# Altium PCB peripheral.PCBDOC (part 4 of 4)
Units mil, origin at the board's own origin, x right, y up, seen from the top; angles counter-clockwise.
Board outline 7500 x 3963 mil, 6 copper layers (Top Layer, Internal Plane 1, MidLayer1, MidLayer2, Internal Plane 2, Bottom Layer); 212 components, 387 nets, 1676 pads, 795 vias.
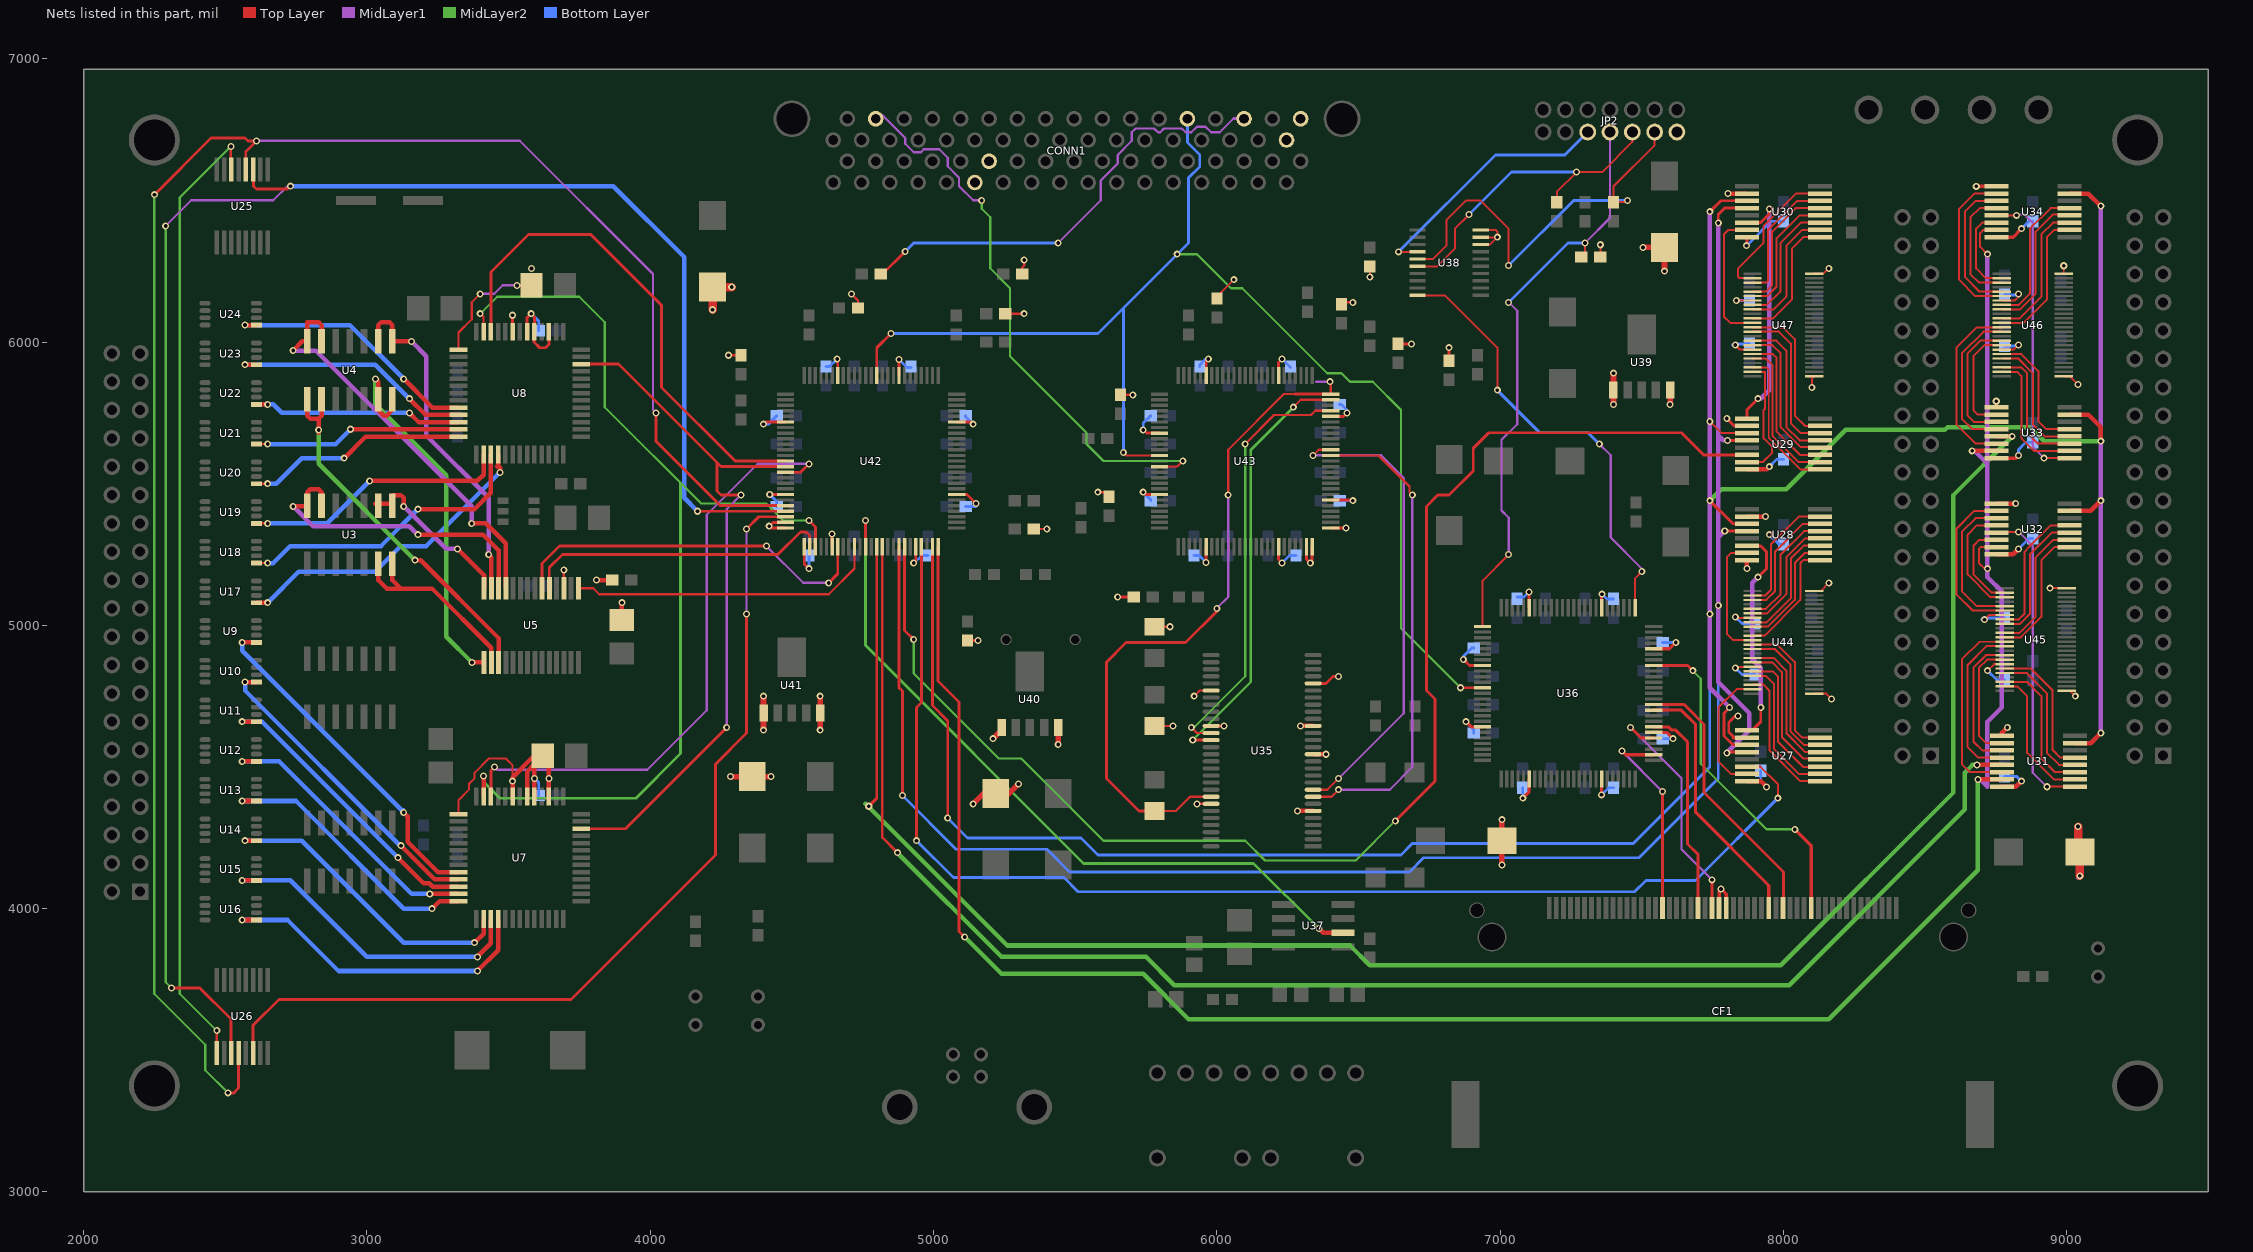
[diagram p8: the nets of this part, all layers, seen from the top]

## Via types
v1: diameter 25, hole 13.5, Top Layer to Bottom Layer, 795 vias

## Nets (pads, with @x,y where several pads share a name; then routed paths per layer and width w, separated by ;. In a path a pad name is that pad's centre, name@x,y a point inside that pad or via, vN(x,y) a via of type N, cw(c..) or ccw(c..) an arc to the next point about the centre after c; other vN are vias at no path point) (continued)
NetU3_6: U3.6 U3.7 U5.2 | length 707.7
  Top Layer w16: U3.6@3040,5217.64 3040,5160 3070,5130 3230,5130 3439.25,4920.75 U5.2@3439.25,4869.09 ; U3.7@3090,5217.64 3090,5160 3120,5130
NetU3_8: U3.8 U3.9 U5.28 | length 605
  Top Layer w16: U3.9@3030,5430 3082.36,5430 U3.8@3090,5422.36 3090,5460 3120,5460 3130,5450 v1(3130,5420) ; v1(3320,5270) 3413.66,5176.34 U5.28@3413.66,5130.91
  MidLayer1 w16: v1(3130,5420) 3280,5270 v1(3320,5270)
NetU3_13: U3.13 U3.14 U5.26 | length 1127.8
  Top Layer w16: v1(2740,5420) 2787.64,5420 U3.14@2790,5422.36 2790,5470 2800,5480 2830,5480 2840,5470 U3.13@2840,5422.36 ; v1(3180,5320) 3410,5320 3464.84,5265.16 U5.26@3464.84,5130.91
  MidLayer1 w16: v1(2740,5420) 2810,5350 3150,5350 v1(3180,5320)
NetU4_1: U4.1 U4.2 U5.3 | length 1319.1
  Top Layer w16: U4.1@2790,5797.64 2790,5740 2800,5730 2830,5730 ; v1@2830,5680 2830,5730 ; U4.2@2840,5797.64 2840,5740 2830,5730 ; v1(3170,5230) 3190,5230 3464.84,4955.16 U5.3@3464.84,4869.09
  MidLayer2 w16: v1(2830,5690) 2830,5570 v1(3170,5230)
NetU4_6: U4.6 U4.7 U5.1 | length 1403.2
  Top Layer w16: v1(3030,5870) 3040,5860 3040,5760 3060,5740 3070,5740 3090,5760 U4.7@3090,5797.64 ; v1(3370.91,4869.09) U5.1@3413.66,4869.09
  MidLayer2 w16: v1(3030,5870) 3030,5780 3280,5530 3280,4960 v1(3370.91,4869.09)
NetU4_8: U4.8 U4.9 U5.27 | length 1229.3
  Top Layer w16: U4.9@3040,6002.36 3040,6060 3050,6070 3080,6070 3090,6060 U4.8@3090,6002.36 v1(3157.64,6002.36) ; v1(3430,5250) 3439.25,5240.75 U5.27@3439.25,5130.91
  MidLayer1 w16: v1(3157.64,6002.36) 3210,5950 3210,5670 3430,5450 v1(3430,5250)
NetU4_13: U4.13 U4.14 U5.25 | length 1472.9
  Top Layer w16: v1(2740,5970) 2772.36,6002.36 U4.14@2790,6002.36 ; U4.14@2787.64,6000 U4.14@2790,6002.36 ; U4.13@2840,6002.36 2840,6060 2830,6070 2790,6070 U4.14@2790,6002.36 ; v1(3370,5360) 3420,5360 3490.43,5289.57 U5.25@3490.43,5130.91 U5.25@3490,5131.34
  MidLayer1 w16: v1(2740,5970) 2820,5970 3370,5420 v1(3370,5360)
NetU5_15: U5.15 U42.35 | length 1097.8
  Top Layer w8: U5.15@3746.34,5130.91 3799.09,5130.91 3820,5110 4630,5110 4720.94,5200.94 U42.35@4720.94,5277.83
NetU5_19: U5.19 U42.27 | length 1089
  Top Layer w10: U5.19@3643.98,5130.91 3643.98,5203.98 3690,5250 4450,5250 4530,5330 4550,5330 4563.46,5316.54 U42.27@4563.46,5277.83
NetU5_20: U5.20 U42.32 | length 1319.5
  Top Layer w10: U5.20@3618.39,5130.91 3618.39,5218.39 3680,5280 v1(4410,5280) ; v1(4630,5150) 4661.89,5181.89 U42.32@4661.89,5277.83
  MidLayer1 w8: v1(4410,5280) 4540,5150 v1(4630,5150)
NetU7_9: U7.9 U9.1 | length 1229.8
  Top Layer w16: v1(2560,4940) U9.1@2610,4940 ; v1(3130,4340) 3143.6,4326.4 3143.6,4236.4 3251.18,4128.82 U7.9@3323.46,4128.82
  Bottom Layer w10: v1(3130,4340) v1@3130,4350
  Bottom Layer w16: v1(2560,4940) 2560,4910 v1(3130,4340)
NetU7_10: U7.10 U10.1 | length 1099.7
  Top Layer w16: v1(2570,4800) U10.1@2610,4800 ; v1(3120,4222.28) 3121.14,4221.14 3239.05,4103.23 U7.10@3323.46,4103.23
  Bottom Layer w16: v1(2570,4800) 2570,4770 3117.72,4222.28 v1(3120,4222.28)
NetU7_11: U7.11 U11.1 | length 1054.7
  Top Layer w16: v1(2560,4660) U11.1@2610,4660 ; v1(3110,4180) 3200,4090 3219.75,4090 3232.12,4077.64 U7.11@3323.46,4077.64
  Bottom Layer w16: v1(2560,4660) 2630,4660 v1(3110,4180)
NetU7_12: U7.12 U12.1 | length 1007.3
  Top Layer w16: v1(2560,4520) U12.1@2610,4520 ; v1(3222.05,4052.05) U7.12@3323.46,4052.05
  Bottom Layer w16: v1(2560,4520) 2690,4520 3157.95,4052.05 v1(3222.05,4052.05)
NetU7_13: U7.13 U13.1 | length 971.8
  Top Layer w16: v1(2560,4380) U13.1@2600,4380 ; v1(3230,4000) 3256.46,4026.46 U7.13@3323.46,4026.46
  Bottom Layer w16: v1(2560,4380) 2750,4380 3130,4000 v1(3230,4000)
NetU7_15: U7.15 U14.1 | length 1095.9
  Top Layer w16: v1(2570,4240) U14.1@2610,4240 ; v1(3380,3880) 3412.05,3912.05 U7.15@3412.05,3963.46
  Bottom Layer w16: v1(2570,4240) 2770,4240 3130,3880 v1(3380,3880)
NetU7_16: U7.16 U15.1 | length 1145
  Top Layer w16: v1(2560,4100) U15.1@2610,4100 ; v1(3390,3830) 3437.64,3877.64 U7.16@3437.64,3963.46
  Bottom Layer w16: v1(2560,4100) 2730,4100 3000,3830 v1(3390,3830)
NetU7_17: U7.17 U16.1 | length 1168.4
  Top Layer w16: v1(2560,3960) U16.1@2610,3960 ; v1(3390,3780) 3463.23,3853.23 U7.17@3463.23,3963.46
  Bottom Layer w16: v1(2560,3960) 2720,3960 2900,3780 v1(3390,3780)
NetU7_50: U7.50 U42.15 | length 2168.6
  Top Layer w10: U7.50@3437.64,4396.54 3437.64,4487.64 v1(3450,4500) ; U42.15@4477.83,5540.63 4530.63,5540.63 v1(4560,5570)
  MidLayer1 w8: v1(3450,4500) 3460,4490 3990,4490 4200,4700 4200,5390 4380,5570 v1(4560,5570)
NetU8_9: U8.9 U24.1 | length 914.1
  Top Layer w16: v1(2570,6060) U24.1@2610,6060 ; v1(3130,5870) 3231.18,5768.82 U8.9@3323.46,5768.82
  Bottom Layer w16: v1(2570,6060) 2940,6060 v1(3130,5870)
NetU8_10: U8.10 U23.1 | length 866.7
  Top Layer w16: v1(2570,5920) U23.1@2610,5920 ; v1(3150,5800) 3206.77,5743.23 U8.10@3323.46,5743.23
  Bottom Layer w16: v1(2570,5920) 3030,5920 v1(3150,5800)
NetU8_11: U8.11 U22.1 | length 739.3
  Top Layer w16: U22.1@2610,5780 v1(2650,5780) ; v1(3150,5750) 3182.36,5717.64 U8.11@3323.46,5717.64
  Bottom Layer w16: v1(2650,5780) 2670,5780 2700,5750 v1(3150,5750)
NetU8_12: U8.12 U21.1 | length 735
  Top Layer w8: U21.1@2610,5640 v1(2650,5640)
  Top Layer w16: v1(2942.05,5692.05) U8.12@3323.46,5692.05
  Bottom Layer w16: v1(2650,5640) 2890,5640 v1(2942.05,5692.05)
NetU8_13: U8.13 U20.1 | length 782.4
  Top Layer w8: U20.1@2610,5500 v1(2650,5500)
  Top Layer w16: v1(2920,5590) 2996.46,5666.46 U8.13@3323.46,5666.46
  Bottom Layer w16: v1(2650,5500) 2680,5500 2770,5590 v1(2920,5590)
NetU8_15: U8.15 U19.1 | length 944.7
  Top Layer w8: U19.1@2610,5360 v1(2650,5360)
  Top Layer w16: v1(3010,5510) 3390,5510 3412.05,5532.05 U8.15@3412.05,5603.46
  Bottom Layer w16: v1(2650,5360) 2860,5360 v1(3010,5510)
NetU8_16: U8.16 U18.1 | length 1066
  Top Layer w8: U18.1@2610,5220 v1(2650,5220)
  Top Layer w16: v1(3180,5410) 3380,5410 3437.64,5467.64 U8.16@3437.64,5603.46
  Bottom Layer w16: v1(2650,5220) 2670,5220 2730,5280 3050,5280 v1(3180,5410)
NetU8_17: U8.17 U17.1 | length 1121
  Top Layer w16: U17.1@2610,5080 v1(2650,5080) ; 3460.64,5560.64 3463.23,5563.23 U8.17@3463.23,5603.46 ; 3463.23,5563.74 3470,5556.97 v1(3470,5540)
  Bottom Layer w16: v1(2650,5080) 2760,5190 3030,5190 3120,5280 3210,5280 v1(3470,5540)
NetU8_50: U8.50 U42.13 | length 1807.4
  Top Layer w10: U8.50@3437.64,6036.54 3437.64,6247.64 3570,6380 3790,6380 4040,6130 4040,5840 4300,5580 U42.13@4477.83,5580
NetU25_14: U25.14 U26.9 | length 3409.3
  Top Layer w8: U26.9@2470.43,3491.06 v1(2470.43,3569.57) ; v1(2520,6690) 2520,6620 2521.61,6618.39 U25.14@2521.61,6608.94
  MidLayer2 w8: v1(2470.43,3569.57) 2340,3700 2340,6510 v1(2520,6690)
NetU27_1: U27.1 U44.46 | length 502
  Top Layer w7: U44.46@7890.75,4790.39 7929.61,4790.39 7950,4770 7950,4560 8059.57,4450.43 U27.1@8128.94,4450.43
NetU27_2: U27.2 U44.44 | length 516.2
  Top Layer w7: U44.44@7890.75,4821.89 7938.11,4821.89 7966,4794 7966,4564 8053.98,4476.02 U27.2@8128.94,4476.02
NetU27_3: U27.3 U44.43 | length 523.8
  Top Layer w7: U44.43@7890.75,4837.64 7962.36,4837.64 7980,4820 7980,4590 8070,4500 U27.3@8140,4500
NetU27_4: U27.4 U44.41 | length 503.9
  Top Layer w7: U44.41@7890.75,4869.13 7960,4869.13 7994,4835.13 7994,4606 8070,4530 U27.4@8120,4530
NetU27_5: U27.5 U44.40 | length 504.6
  Top Layer w7: U44.40@7890.75,4884.88 7965.12,4884.88 8010,4840 8010,4620 8077.21,4552.8 U27.5@8128.94,4552.8
NetU27_6: U27.6 U44.38 | length 516.7
  Top Layer w7: U44.38@7890.75,4916.38 7970,4916.38 8024,4862.38 8024,4626 8071.61,4578.39 U27.6@8128.94,4578.39
NetU27_7: U27.7 U44.37 | length 514.7
  Top Layer w7: U44.37@7890.75,4932.13 7977.87,4932.13 8040,4870 8040,4630 8066.02,4603.98 U27.7@8128.94,4603.98
NetU27_14: U27.14 U42.47 | length 4480.7
  Top Layer w7: U27.14@7871.06,4501.61 7918.39,4501.61 7980,4440 v1(7980,4390)
  Top Layer w10: v1(4940,4240) 4940,4710 4957.17,4727.17 U42.47@4957.17,5277.83
  Bottom Layer w10: v1(4940,4240) 5070,4110 5460,4110 5510,4060 7474.61,4060 7514.61,4100 7690,4100 v1(7980,4390)
NetU27_15: U27.15 U44.47 | length 456.8
  Top Layer w7: U27.15@7871.06,4476.02 7813.98,4476.02 7770,4520 7770,4710 7834.65,4774.65 U44.47@7890.75,4774.65
NetU28_1: U28.1 U44.35 | length 424.9
  Top Layer w7: U44.35@7890.75,4963.62 7933.62,4963.62 8060,5090 8060,5220 8070.43,5230.43 U28.1@8128.94,5230.43
NetU28_2: U28.2 U44.33 | length 422.4
  Top Layer w7: U44.33@7890.75,4995.12 7945.12,4995.12 8040,5090 8040,5220 8076.02,5256.02 U28.2@8128.94,5256.02
NetU28_3: U28.3 U44.32 | length 432.3
  Top Layer w7: U44.32@7890.75,5010.87 7940.87,5010.87 8026,5096 8026,5236 8071.61,5281.61 U28.3@8128.94,5281.61
NetU28_4: U28.4 U44.30 | length 424
  Top Layer w7: U44.30@7890.75,5042.36 7942.36,5042.36 8010,5110 8010,5240 8077.21,5307.21 U28.4@8128.94,5307.21
NetU28_5: U28.5 U44.29 | length 434
  Top Layer w7: U44.29@7890.75,5058.11 7938.11,5058.11 7990,5110 7990,5250 8072.8,5332.8 U28.5@8128.94,5332.8
NetU28_6: U28.6 U44.27 | length 431.5
  Top Layer w7: U44.27@7890.75,5089.61 7939.61,5089.61 7970,5120 7970,5260 8068.39,5358.39 U28.6@8128.94,5358.39
NetU28_7: U28.7 U44.26 | length 447.4
  Top Layer w7: U44.26@7890.75,5105.35 7935.56,5105.35 7956,5125.8 7956,5286 8053.98,5383.98 U28.7@8128.94,5383.98
NetU28_15: U28.15 U44.36 | length 447.6
  Top Layer w7: U28.15@7871.06,5256.02 7816.02,5256.02 7800,5240 7800,4970 7822.13,4947.87 U44.36@7890.75,4947.87
NetU29_1: U29.1 U47.46 | length 527.9
  Top Layer w7: U47.46@7890.75,5910.39 7939.61,5910.39 7948,5902 7948,5662 8059.57,5550.43 U29.1@8128.94,5550.43
NetU29_2: U29.2 U47.44 | length 536.2
  Top Layer w7: U47.44@7890.75,5941.89 7938.11,5941.89 7962,5918 7962,5668 8053.98,5576.02 U29.2@8128.94,5576.02
NetU29_3: U29.3 U47.43 | length 538
  Top Layer w7: U47.43@7890.75,5957.64 7962.36,5957.64 7976,5944 7976,5684 8058.39,5601.61 U29.3@8128.94,5601.61
NetU29_4: U29.4 U47.41 | length 550.3
  Top Layer w7: U47.41@7890.75,5989.13 7960.87,5989.13 7990,5960 7990,5700 8060,5630 U29.4@8140,5630
NetU29_5: U29.5 U47.40 | length 542.2
  Top Layer w7: U47.40@7890.75,6004.88 7975.12,6004.88 8010,5970 8010,5700 8057.21,5652.8 U29.5@8128.94,5652.8
NetU29_6: U29.6 U47.38 | length 550.5
  Top Layer w7: U47.38@7890.75,6036.38 7983.62,6036.38 8026,5994 8026,5714 8061.61,5678.39 U29.6@8128.94,5678.39
NetU29_7: U29.7 U47.37 | length 540.6
  Top Layer w7: U47.37@7890.75,6052.13 7997.87,6052.13 8040,6010 8040,5740 8076.02,5703.98 U29.7@8128.94,5703.98
NetU29_14: U29.14 U42.44 | length 4990.9
  Top Layer w10: U42.44@4898.11,5277.83 4898.11,4981.89 v1(4930,4950) ; v1(6630,4310) 6770,4450 6770,4740 6740,4770 6740,5420 6780,5460 6820,5460 6905.24,5545.24 6905.24,5625.24 6960,5680 7640,5680 7718.39,5601.61 U29.14@7871.06,5601.61
  MidLayer2 w8: v1(4930,4950) 4930,4830 5230,4530 5310,4530 5600,4240 6100,4240 6170,4170 6490,4170 v1(6630,4310)
NetU29_15: U29.15 U47.47 | length 445
  Top Layer w7: U29.15@7871.06,5576.02 7926.02,5576.02 7960,5610 7960,5630 7930,5660 7930,5760 7934,5764 7934,5894.65 U47.47@7890.75,5894.65
NetU30_1: U30.1 U47.35 | length 453.3
  Top Layer w7: U47.35@7890.75,6083.62 7963.62,6083.62 8030,6150 8030,6330 8070,6370 U30.1@8120,6370
NetU30_2: U30.2 U47.33 | length 460
  Top Layer w7: U47.33@7890.75,6115.12 7965.12,6115.12 8010,6160 8010,6340 8066.02,6396.02 U30.2@8128.94,6396.02
NetU30_3: U30.3 U47.32 | length 458.2
  Top Layer w7: U47.32@7890.75,6130.87 7940.87,6130.87 7990,6180 7990,6350 8061.61,6421.61 U30.3@8128.94,6421.61
NetU30_4: U30.4 U47.30 | length 455.8
  Top Layer w7: U47.30@7890.75,6162.36 7942.36,6162.36 7976,6196 7976,6366 8057.21,6447.21 U30.4@8128.94,6447.21
NetU30_5: U30.5 U47.29 | length 471.6
  Top Layer w7: U47.29@7890.75,6178.11 7938.11,6178.11 7960,6200 7960,6390 8042.8,6472.8 U30.5@8128.94,6472.8
NetU30_6: U30.6 U47.27 | length 463.2
  Top Layer w7: U47.27@7890.75,6209.61 7939.61,6209.61 7946,6216 7946,6396 8048.39,6498.39 U30.6@8128.94,6498.39
NetU30_7: U30.7 U47.26 | length 516.1
  Top Layer w7: U47.26@7890.75,6225.35 7844.65,6225.35 7840,6230 7840,6260 7930,6350 7930,6410 8043.98,6523.98 U30.7@8128.94,6523.98
NetU30_15: U30.15 U47.36 | length 487.6
  Top Layer w7: U30.15@7871.06,6396.02 7806.02,6396.02 7790,6380 7790,6090 7812.13,6067.87 U47.36@7890.75,6067.87
NetU31_2: U31.2 U45.47 | length 501.5
  Top Layer w7: U45.47@8780.75,4784.65 8825.35,4784.65 8860,4750 8860,4550 8953.98,4456.02 U31.2@9028.94,4456.02
NetU31_3: U31.3 U45.46 | length 509.1
  Top Layer w7: U45.46@8780.75,4800.39 8859.61,4800.39 8910,4750 8910,4530 8958.39,4481.61 U31.3@9028.94,4481.61
NetU31_4: U31.4 U45.44 | length 505.7
  Top Layer w7: U45.44@8780.75,4831.89 8858.11,4831.89 8930,4760 8930,4550 8972.8,4507.21 U31.4@9028.94,4507.21
NetU31_5: U31.5 U45.43 | length 501.6
  Top Layer w7: U45.43@8780.75,4847.64 8872.36,4847.64 8950,4770 8950,4560 8977.21,4532.8 U31.5@9028.94,4532.8
NetU31_10: U31.10 U45.41 | length 434.7
  Top Layer w7: U31.10@8771.06,4583.98 8716.02,4583.98 8690,4610 8690,4850 8719.13,4879.13 U45.41@8780.75,4879.13
NetU31_11: U31.11 U45.40 | length 503.5
  Top Layer w7: U31.11@8771.06,4558.39 8701.61,4558.39 8670,4590 8670,4850 8714.88,4894.88 U45.40@8780.75,4894.88
NetU31_12: U31.12 U45.38 | length 584.7
  Top Layer w7: U31.12@8771.06,4532.8 8687.21,4532.8 8650,4570 8650,4860 8716.38,4926.38 U45.38@8780.75,4926.38
NetU31_13: U31.13 U42.40 | length 5592.6
  Top Layer w10: U42.40@4819.37,5277.83 4819.37,4250.63 v1(4872.44,4197.56)
  Top Layer w16: v1(8682.8,4507.21) U31.13@8771.06,4507.21
  MidLayer2 w16: v1(4872.44,4197.56) 5240,3830 5750,3830 5850,3730 8020,3730 8640,4350 8640,4480 8667.21,4507.21 v1(8682.8,4507.21)
NetU31_14: U31.14 U45.37 | length 699.3
  Top Layer w7: U31.14@8771.06,4481.61 8658.39,4481.61 8630,4510 8630,4880 8692.13,4942.13 U45.37@8780.75,4942.13
NetU32_2: U32.2 U45.36 | length 477.1
  Top Layer w7: U45.36@8780.75,4957.87 8837.87,4957.87 8910,5030 8910,5230 8956.02,5276.02 U32.2@9008.94,5276.02
NetU32_3: U32.3 U45.35 | length 487.1
  Top Layer w7: U45.35@8780.75,4973.62 8833.62,4973.62 8890,5030 8890,5240 8951.61,5301.61 U32.3@9008.94,5301.61
NetU32_4: U32.4 U45.33 | length 484.6
  Top Layer w7: U45.33@8780.75,5005.12 8835.12,5005.12 8870,5040 8870,5250 8947.21,5327.21 U32.4@9008.94,5327.21
NetU32_5: U32.5 U45.32 | length 494.6
  Top Layer w7: U45.32@8780.75,5020.87 8830.87,5020.87 8850,5040 8850,5258.64 8870,5278.64 8870,5280 8942.8,5352.8 U32.5@9008.94,5352.8
NetU32_10: U32.10 U45.30 | length 592.2
  Top Layer w7: U32.10@8751.06,5403.98 8673.98,5403.98 8610,5340 8610,5110 8667.64,5052.36 U45.30@8780.75,5052.36
NetU32_11: U32.11 U45.29 | length 523.3
  Top Layer w7: U32.11@8751.06,5378.39 8678.39,5378.39 8630,5330 8630,5120 8681.89,5068.11 U45.29@8780.75,5068.11
NetU32_12: U32.12 U45.27 | length 418.7
  Top Layer w7: U32.12@8751.06,5352.8 8682.8,5352.8 8650,5320 8650,5180 8730.39,5099.61 U45.27@8780.75,5099.61
NetU32_14: U32.14 U45.26 | length 327.5
  Top Layer w7: U32.14@8751.06,5301.61 8691.61,5301.61 8670,5280 8670,5180 8734.65,5115.35 U45.26@8780.75,5115.35
NetU33_2: U33.2 U46.47 | length 482.5
  Top Layer w7: U46.47@8770.75,5894.65 8825.35,5894.65 8840,5880 8840,5660 8883.98,5616.02 U33.2@9008.94,5616.02
NetU33_3: U33.3 U46.46 | length 472.5
  Top Layer w7: U46.46@8770.75,5910.39 8839.61,5910.39 8860,5890 8860,5680 8898.39,5641.61 U33.3@9008.94,5641.61
NetU33_4: U33.4 U46.44 | length 457.4
  Top Layer w7: U46.44@8770.75,5941.89 8828.11,5941.89 8880,5890 8880,5710 8922.8,5667.21 U33.4@9008.94,5667.21
NetU33_5: U33.5 U46.43 | length 451.9
  Top Layer w7: U46.43@8770.75,5957.64 8840,5957.64 8900,5897.64 8900,5720 8927.21,5692.8 U33.5@9008.94,5692.8
NetU33_10: U33.10 U46.41 | length 394.7
  Top Layer w7: U33.10@8751.06,5743.98 8686.02,5743.98 8670,5760 8670,5950 8709.13,5989.13 U46.41@8770.75,5989.13
NetU33_11: U33.11 U46.40 | length 469.4
  Top Layer w7: U33.11@8751.06,5718.39 8671.61,5718.39 8650,5740 8650,5960 8694.88,6004.88 U46.40@8770.75,6004.88
NetU33_12: U33.12 U46.38 | length 538.9
  Top Layer w7: U33.12@8751.06,5692.8 8667.21,5692.8 8630,5730 8630,5960 8706.38,6036.38 U46.38@8770.75,6036.38
NetU33_13: U33.13 U42.39 | length 6656.1
  Top Layer w10: v1(4771.38,4361.38) 4799.69,4389.69 U42.39@4799.69,5277.83
  Top Layer w16: U33.13@8751.06,5667.21 v1(8807.21,5667.21)
  MidLayer2 w16: 4760,4370 5260,3870 6470,3870 6540,3800 7990,3800 8600,4410 8600,5460 v1(8807.21,5667.21)
NetU33_14: U33.14 U46.37 | length 630
  Top Layer w7: U33.14@8751.06,5641.61 8678.39,5641.61 8610,5710 8610,5980 8682.13,6052.13 U46.37@8770.75,6052.13
NetU34_2: U34.2 U46.36 | length 503
  Top Layer w7: U46.36@8770.75,6067.87 8847.87,6067.87 8930,6150 8930,6370 8956.02,6396.02 U34.2@9008.94,6396.02
NetU34_3: U34.3 U46.35 | length 507.1
  Top Layer w7: U46.35@8770.75,6083.62 8833.62,6083.62 8910,6160 8910,6380 8951.61,6421.61 U34.3@9008.94,6421.61
NetU34_4: U34.4 U46.33 | length 516.8
  Top Layer w7: U46.33@8770.75,6115.12 8835.12,6115.12 8890,6170 8890,6390 8950,6450 U34.4@9020,6450
NetU34_5: U34.5 U46.32 | length 514.6
  Top Layer w7: U46.32@8770.75,6130.87 8830.87,6130.87 8870,6170 8870,6400 8942.8,6472.8 U34.5@9008.94,6472.8
NetU34_10: U34.10 U46.30 | length 578
  Top Layer w7: U34.10@8751.06,6523.98 8673.98,6523.98 8620,6470 8620,6220 8677.64,6162.36 U46.30@8770.75,6162.36
NetU34_11: U34.11 U46.29 | length 509.2
  Top Layer w7: U34.11@8751.06,6498.39 8678.39,6498.39 8640,6460 8640,6230 8691.89,6178.11 U46.29@8770.75,6178.11
NetU34_12: U34.12 U46.27 | length 428
  Top Layer w7: 8689.65,6210 U46.27@8770,6210 ; 8690.39,6209.61 8660,6240 8660,6440 8692.8,6472.8 U34.12@8751.06,6472.8
NetU34_14: U34.14 U46.26 | length 325.1
  Top Layer w7: U34.14@8751.06,6421.61 8701.61,6421.61 8680,6400 8680,6260 8714.65,6225.35 U46.26@8770.75,6225.35
NetU36_51: U36.51 U38.10 | length 1596.3
  Top Layer w7: U38.10@6708.78,6164.84 6805.16,6164.84 6990,5980 v1(6990,5830) ; U36.51@7476.22,5062.17 7476.22,5166.22 v1(7500,5190)
  MidLayer1 w8: v1(7350,5640) 7390,5600 7390,5310 7500,5200 v1(7500,5190)
  Bottom Layer w10: v1(6990,5830) 7140,5680 7310,5680 v1(7350,5640)
NetU37_2: U37.2 U42.37 | length 2638
  Top Layer w10: v1(4760,5370) 4760.32,5369.69 U42.37@4760.32,5277.83
  Top Layer w16: v1(6360,3930) 6375,3915 U37.2@6445.32,3915
  MidLayer2 w10: v1(4760,5370) 4760,4930 5530,4160 6130,4160 v1(6360,3930)
OE: CF1.9 U36.27 | length 736.9
  Top Layer w11: v1@7430,4550 v1(7430,4556.26) 7442.8,4543.46 U36.27@7542.17,4543.46 ; CF1.9@7573.13,4002.36 v1(7573.13,4413.13)
  MidLayer1 w8: v1(7430,4556.26) v1(7573.13,4413.13)
PA0: U35.40 U43.47 | length 1513.5
  Top Layer w8: v1(5910,4640) 5930,4620 U35.40@5980,4620 ; v1(6100,5640) 6202.15,5742.15 6332.15,5742.15 6347.17,5757.17 U43.47@6402.17,5757.17
  MidLayer2 w8: v1(5910,4640) 5920,4640 6100,4820 v1(6100,5640)
PA1: U35.41 U43.49 | length 1530.2
  Top Layer w8: v1(6270,5770) 6296.54,5796.54 U43.49@6402.17,5796.54
  Top Layer w10: v1(5915,4595) U35.41@5980,4595
  MidLayer2 w8: v1(5915,4595) 6120,4800 6120,5600
  MidLayer2 w10: 6120,5600 6120,5620 v1(6270,5770)
PROGRAM: CONN1.47 R26.1 | length 1899.9
  Top Layer w8: v1(5130,6420) 5200,6490 5200,6580 5240,6620 CONN1.47@5240,6700
  Top Layer w10: v1(5160,5330) 5310,5180 R26.1@5326.54,5180
  MidLayer1 w8: v1(4930,6280) 5070,6420 v1(5130,6420)
  MidLayer2 w10: v1(4930,6280) 4970,6240 4970,6080 5020,6030 5020,5820 5070,5770 5070,5730 5130,5670 5160,5670 5190,5640 5190,5360 v1(5160,5330)
PROGRAM: CONN1.64 R13.1 | length 1658
  Top Layer w10: R13.1@4813.46,6240 4820,6240 v1(4900,6320)
  MidLayer1 w8: v1(5440,6350) 5590,6500 5590,6570 5650,6630 5650,6660 5700,6710 5700,6740 5713.93,6753.93 5778.07,6753.93 5792,6740 5800,6740 5813.93,6753.93 5876.07,6753.93 5890,6740 5910,6740 5929.79,6759.79 5960.21,6759.79 5980,6740 6010,6740 6058,6788 CONN1.64@6096,6788 ; 6060,6790 6090,6790 CONN1.64@6092,6788
  Bottom Layer w10: v1(4900,6320) 4930,6350 v1(5440,6350)
QH0: U31.1 U32.13 | length 1120.3
  Top Layer w7: U32.13@8751.06,5327.21 8753.86,5330 v1(8830,5330) ; v1(8929.57,4430.43) U31.1@9028.94,4430.43
  MidLayer1 w8: v1(8830,5330) 8880,5280 8880,4480 v1(8929.57,4430.43)
QH1: U33.1 U34.13 | length 1069.1
  Top Layer w7: U34.13@8751.06,6447.21 v1(8822.8,6447.21) ; v1(8920,5590) U33.1@9000,5590
  MidLayer1 w8: v1(8822.8,6447.21) 8825.59,6450 8850,6450 8880,6420 8880,5630 v1(8920,5590)
QH2: U27.9 U28.14 | length 763
  Top Layer w10: U27.9@7871.06,4629.57 7889.57,4629.57 7920,4660 v1(7920,4710) ; U28.14@7880,5280 7920,5280 7940,5260 7940,5200 v1(7910,5170)
  MidLayer1 w16: v1(7910,5170) 7890,5150 7890,4880 7920,4850 v1(7920,4710)
QH3: U29.9 U30.14 | length 888.6
  Top Layer w10: U29.9@7871.06,5729.57 7871.06,5761.06 v1(7910,5800) ; U30.14@7871.06,6421.61 7919.69,6421.61 7950,6451.92 v1(7950,6470)
  MidLayer1 w16: v1(7910,5800) 7920,5800 7950,5830 v1(7950,6470)
R\E\S\E\T\: U7.37 U8.37 U42.14 | length 2564.1
  Top Layer w10: U7.37@3756.54,4282.36 3912.36,4282.36 v1(4270,4640) ; U8.37@3756.54,5922.36 3887.64,5922.36 4249.69,5560.32 U42.14@4477.83,5560.32 ; 4235.48,5574.52 4235.48,5474.52 4250,5460 v1(4320,5460)
  MidLayer1 w8: v1(4270,4640) 4270,5410 v1(4320,5460)
RCLK: U27.12 U28.12 U29.12 U30.12 U42.43 | length 7001.7
  Top Layer w10: U42.43@4878.43,5277.83 4878.43,4780 4890,4768.43 v1(4890,4400) ; v1(7770,6420) 7770,6450 7792.8,6472.8 U30.12@7871.06,6472.8 ; v1(7792.8,5332.8) U28.12@7871.06,5332.8 ; v1(7800,4550) 7802.8,4552.8 U27.12@7871.06,4552.8 ; v1(7802.8,5652.8) U29.12@7871.06,5652.8
  MidLayer1 w16: 7770,5310 v1(7792.8,5332.8) ; 7770,5670 7787.21,5652.8 v1(7802.8,5652.8) ; v1(7770,6420) 7770,4800 7880,4690 7880,4629.57 ; v1(7800,4550) 7880,4630
  Bottom Layer w10: v1(4890,4400) 5080,4210 5400,4210 5480,4130 6680,4130 6730,4180 7490,4180 7770,4460 v1(7770,5070)
RDY0: U35.8 U43.39 | length 1710.9
  Top Layer w8: U35.8@6340,4395 6405,4395 v1(6430,4420) ; U43.39@6402.17,5599.69 6570.31,5599.69 6680,5490 6680,5470 v1(6690,5460)
  MidLayer1 w8: v1(6430,4420) 6610,4420 6690,4500 v1(6690,5460)
RDY1: U35.9 U43.40 | length 1685.2
  Top Layer w8: U35.9@6340,4420 6390,4420 v1(6430,4460) ; v1(6340,5600) 6359.37,5619.37 U43.40@6402.17,5619.37
  MidLayer1 w8: v1(6340,5600) 6580,5600 6660,5520 6660,4690 v1(6430,4460)
READY: CF1.37 U36.30 | length 854.7
  Top Layer w11: v1(7460,4640) 7497.48,4602.52 U36.30@7542.17,4602.52 ; CF1.37@7748.13,4002.36 v1(7748.13,4101.87)
  MidLayer1 w8: v1(7460,4640) 7640,4460 7640,4210 v1(7748.13,4101.87)
REG: CF1.44 U36.43 | length 1214.9
  Top Layer w11: U36.43@7542.17,4858.43 7661.57,4858.43 v1(7680,4840) ; v1(8040,4280) 8098.13,4221.87 CF1.44@8098.13,4002.36
  MidLayer2 w8: v1(7680,4840) 7708.38,4811.62 7708.38,4511.62 7940,4280 v1(8040,4280)
RESET: CF1.41 U36.35 | length 923.5
  Top Layer w11: U36.35@7542.17,4700.94 7639.06,4700.94 7690,4650 7690,4340 7948.13,4081.87 CF1.41@7948.13,4002.36
S\Y\N\C\: U7.51 U8.51 U42.28 | length 3689.2
  Top Layer w8: v1(3400,6100) 3412.05,6087.95 U8.51@3412.05,6036.54
  Top Layer w10: v1(4560,5370) 4583.15,5346.85 U42.28@4583.15,5277.83
  Top Layer w16: U7.51@3412.05,4396.54 v1(3412.05,4467.95)
  MidLayer2 w8: v1(3400,6100) 3460,6160 3750,6160 3840,6070 3840,5770 4180,5430 4410,5430 4470,5370 v1(4560,5370)
  MidLayer2 w10: v1(3412.05,4467.95) 3412.05,4447.95 3470,4390 3950,4390 4107.34,4547.34 4107.34,5502.66
SCLK: U27.11 U28.11 U29.11 U30.11 U31.7 U32.7 U33.7 U34.7 U42.49 | length 10742.7
  Top Layer w7: v1(7740,5720) 7781.61,5678.39 U29.11@7871.06,5678.39
  Top Layer w10: U42.49@4996.54,5277.83 4996.54,4716.54 5050,4663.07 v1(5050,4320) ; v1(7740,5440) 7821.61,5358.39 U28.11@7871.06,5358.39 ; v1(7740,6460) 7778.39,6498.39 U30.11@7871.06,6498.39 ; v1(7810,4710) 7790,4690 7790,4610 7821.61,4578.39 U27.11@7871.06,4578.39
  Top Layer w16: U32.7@9008.94,5403.98 9083.98,5403.98 v1(9120,5440) ; U33.7@9008.94,5743.98 9076.02,5743.98 9120,5700 v1(9120,5650) ; U34.7@9008.94,6523.98 9076.02,6523.98 v1(9120,6480) ; U31.7@9028.94,4583.98 9083.98,4583.98 v1(9120,4620)
  MidLayer1 w16: v1(7740,6460) 7740,4780 v1(7810,4710) ; v1(9120,4620) v1(9120,6480)
  MidLayer2 w16: v1(7740,5440) 7780,5480 8010,5480 8220,5690 8570,5690 8580,5700 8870,5700 8920,5650 v1(9120,5650)
  Bottom Layer w10: v1(5050,4320) 5120,4250 5520,4250 5580,4190 6650,4190 6690,4230 7470,4230 7740,4500 v1(7740,5040)
SELCLK: U25.11 U26.11 U42.22 | length 6491
  Top Layer w10: v1(2310,3720) 2410,3720 2520,3610 U26.11@2520,3480 ; U25.11@2600,6600 2600,6550 2610,6540 2720,6540 v1(2730,6550) ; v1(4167.17,5402.83) U42.22@4477.83,5402.83
  MidLayer1 w8: v1(2290,6410) 2380,6500 2670,6500 2720,6550 v1(2730,6550)
  MidLayer2 w8: v1(2290,6410) 2290,3740 v1(2310,3720)
  Bottom Layer w16: v1(2730,6550) 3870,6550 4120,6300 4120,5450 v1(4167.17,5402.83)
SELRCLK: U25.12 U26.12 U42.21 | length 6750.2
  Top Layer w10: v1(2250,6520) 2450,6720 2570,6720 2580,6710 v1(2610,6710) 2572.8,6672.8 U25.12@2572.8,6608.94 ; v1(2510,3350) 2530,3350 2547.21,3367.21 U26.12@2547.21,3491.06 ; v1(4020,5750) 4020,5650 4247.48,5422.52 U42.21@4477.83,5422.52
  MidLayer1 w8: v1(2610,6710) 3540,6710 4010,6240 4010,5760 v1(4020,5750)
  MidLayer2 w8: v1(2250,6520) 2250,3700 2430,3520 2430,3430 v1(2510,3350)
SELSER: U26.14 U42.23 | length 3329.4
  Top Layer w10: U26.14@2598.39,3491.06 2598.39,3588.39 2690,3680 3720,3680 4230,4190 4230,4510 4340,4620 v1(4340,5040) ; v1(4340,5340) 4383.15,5383.15 U42.23@4477.83,5383.15
  MidLayer1 w8: v1(4340,5040) v1(4340,5340)
SHLD: U31.15 U32.15 U33.15 U34.15 U42.50 | length 8158.7
  Top Layer w7: v1(8720,5200) 8710,5200 8690,5220 8690,5270 8696.02,5276.02 U32.15@8751.06,5276.02 ; v1(8720,6310) 8694,6336 8694,6384 8706.02,6396.02 U34.15@8751.06,6396.02
  Top Layer w10: U42.50@5016.22,5277.83 5016.22,4803.78 5090,4730 5090,3920 v1(5110,3900)
  Top Layer w16: v1(8666.02,5616.02) U33.15@8751.06,5616.02 ; v1(8686.02,4456.02) U31.15@8771.06,4456.02
  MidLayer1 w16: v1(8666.02,5616.02) 8673.98,5616.02 8720,5570 ; v1(8686.02,4456.02) 8693.98,4456.02 8720,4430 8720,4660 8770,4710 8770,5120 8720,5170 v1(8720,6310)
  MidLayer2 w16: v1(5110,3900) 5240,3770 5740,3770 5900,3610 8160,3610 8686.02,4136.02 v1(8686.02,4456.02)
SYSCLK: CONN1.60 U36.87 U42.87 U43.87 | length 4628.9
  Top Layer w8: v1(5670,5610) 5680.31,5599.69 U43.87@5797.83,5599.69
  Top Layer w10: U42.87@4799.69,5882.17 4799.69,5979.69 v1(4850,6030) ; v1(6860.31,4779.69) U36.87@6937.83,4779.69
  MidLayer2 w8: v1(5860,6310) 5930,6310 6050,6190 6090,6190 6390,5890 6440,5890 6470,5860 6550,5860 6650,5760 6650,4990 v1(6860.31,4779.69)
  Bottom Layer w10: v1(4850,6030) 5580,6030 5900,6350 5900,6580 5940,6620 5940,6660 5896,6704 CONN1.60@5896,6788 ; v1(5670,5610) 5670,6120
TCK: JP2.6 R41.1 U38.6 | length 1151
  Top Layer w7: U38.6@6708.78,6267.2 6777.2,6267.2 6840,6330 6840,6400 v1(6890,6450) ; R41.1@7200,6493.46 7200,6530 v1(7270,6600) 7360,6600 7466.52,6706.52 JP2.6@7466.52,6741.26
  Bottom Layer w10: v1(6890,6450) 7040,6600 v1(7270,6600)
TDI: JP2.10 U38.4 | length 909.8
  Top Layer w7: v1(6641.61,6318.39) U38.4@6708.78,6318.39
  Bottom Layer w10: v1(6641.61,6318.39) 6983.23,6660 7227.78,6660 JP2.10@7309.04,6741.26
TDO: JP2.8 R44.1 U36.76 | length 2067.7
  Top Layer w7: U36.76@6937.83,4996.22 6937.83,5157.83 v1(7030,5250) ; R44.1@7286.54,6300 7300,6313.46 v1(7300,6350)
  MidLayer1 w8: v1(7030,5250) 7030,5380 7005,5405 7005,5655 7060,5710 7060,6110 v1(7030,6140) ; v1(7300,6350) 7387.78,6437.78 JP2.8@7387.78,6741.26
  Bottom Layer w10: v1(7030,6140) 7240,6350 v1(7300,6350)
TMS: JP2.4 R40.1 U38.5 | length 1507.1
  Top Layer w7: U38.5@6708.78,6292.8 6762.8,6292.8 6810,6340 6810,6430 6880,6500 6930,6500 7030,6400 v1(7030,6270) ; v1(7450,6500) 7443.46,6493.46 R40.1@7400,6493.46 7400,6550 7545.26,6695.26 JP2.4@7545.26,6741.26
  Bottom Layer w10: v1(7030,6270) 7260,6500 v1(7450,6500)
UEVENTCE: CONN1.38 U43.89 | length 1997.8
  Top Layer w8: U43.89@5797.83,5560.32 5860.32,5560.32 v1(5880,5580)
  MidLayer1 w8: CONN1.38@4820,6800 4900,6720 4900,6700 4930,6670 4955.83,6670 4965.83,6680 5020,6680 5050,6650 5050,6620 5090,6580 5090,6550 5140,6500 v1(5170,6500)
  MidLayer2 w8: v1(5170,6500) 5170,6470 5200,6440 5200,6260 5270,6190 5270,5950 5540,5680 5540,5640 5600,5580 v1(5880,5580)
URESET: R27.2 U35.49 U43.50 | length 2437.7
  Top Layer w8: R27.2@5780,4344.88 5854.88,4344.88 5905,4395 U35.49@5980,4395 ; v1(6040,5460) 6040,5620 6236.22,5816.22 6276.22,5816.22
  Top Layer w10: R27.2@5780,4344.88 5725.12,4344.88 5610,4460 5610,4870 5680,4940 5890,4940 6000,5050 v1(6000,5060) ; 6276.22,5816.22 U43.50@6402.17,5816.22 6402.17,5857.83 v1(6400,5860)
  MidLayer1 w8: v1(6000,5060) 6040,5100 v1(6040,5460) ; 6350,5860 v1(6400,5860)
VCC: C14.2 C17.1 C18.2 C29.2 C32.1 C34.1 C44.1 C45.1 C46.1 C47.1 C48.1 C49.1 C50.1 C51.1 C68.1 C69.1 C70.1 C71.1 C72.1 C73.1 C74.1 C75.1 C88.1 C89.1 C90.1 C91.1 C92.1 C93.1 C94.1 C95.1 C107.2 C108.2 C115.2 C116.2 C119.1 C121.1 C124.2 C125.2 C126.2 C127.2 C128.2 C129.2 C130.2 C131.2 C138.2 C139.2 C140.2 C141.2 C148.1 C149.1 C150.1 C151.1 CF1.13 CF1.38 CONN1.11 CONN1.12 CONN1.67 CONN1.68 JP2.2 R2.2 R3.2 R6.2 R7.2 R9.2 R11.2 R15.2 R16.2 R19.2 R20.2 R22.2 R24.2 R28.1 R29.1 R30.2 R43.2 R44.2 U5.17 U7.1 U7.42 U7.44 U7.45 U7.47 U8.1 U8.42 U8.44 U8.45 U8.47 U27.10 U27.16 U28.10 U28.16 U29.10 U29.16 U30.10 U30.16 U31.9 U31.16 U32.9 U32.16 U33.9 U33.16 U34.9 U34.16 U35.6 U35.14 U35.18 U35.24 U35.34 U35.39 U35.50 U36.6 U36.19 U36.31 U36.46 U36.57 U36.70 U36.83 U36.94 U38.18 U38.19 U38.20 U39.1 U39.5 U40.1 U40.5 U41.1 U41.5 U42.6 U42.19 U42.24 U42.25 U42.26 U42.31 U42.46 U42.57 U42.70 U42.83 U42.94 U43.6 U43.19 U43.24 U43.25 U43.26 U43.31 U43.46 U43.57 U43.70 U43.83 U43.94 U44.1 U44.24 U44.31 U44.42 U45.1 U45.24 U45.31 U45.42 U46.1 U46.24 U46.31 U46.42 U47.1 U47.24 U47.31 U47.42 | length 11562
  Top Layer w7: U7.1@3323.46,4333.54 3323.46,4383.46 3360,4420 3360,4440 3380,4460 3380,4480 3430,4530 3490,4530 3514.41,4505.59 v1(3514.41,4450) ; v1(6540,6230) R43.2@6540,6266.54 ; U38.18@6931.22,6343.98 6963.98,6343.98 v1(6990,6370) 6990,6390 6984.84,6395.16 U38.20@6931.22,6395.16 ; U38.19@6931.22,6369.57 v1@6989.57,6369.57 ; R44.2@7353.46,6300 v1(7353.46,6343.46) ; v1(7830,4850) 7833.39,4853.39 U44.42@7890.75,4853.39 ; v1(7830,5030) 7833.39,5026.61 U44.31@7890.75,5026.61 ; v1(7830,5990) 7846.61,5973.39 U47.42@7890.75,5973.39 ; v1(7833.46,6146.54) 7833.54,6146.61 U47.31@7890.75,6146.61 ; U47.1@8088.9,5878.9 U47.1@8109.25,5878.9 8100,5869.65 v1(8100,5840) ; U44.1@8109.25,4758.9 8151.1,4758.9 v1(8170,4740) ; U44.24@8109.25,5121.1 8131.1,5121.1 v1(8160,5150) ; U47.24@8109.25,6241.1 8141.1,6241.1 v1(8160,6260) ; v1(8710,5020) 8726.61,5036.61 U45.31@8780.75,5036.61 ; v1(8720,4840) 8743.39,4863.39 U45.42@8780.75,4863.39 ; U33.9@8751.06,5769.57 v1(8751.06,5791.06) ; U46.42@8770.75,5973.39 8813.39,5973.39 v1(8830,5990) ; U46.31@8770.75,6146.61 8816.61,6146.61 8830,6160 v1(8830,6170) ; v1(8941.1,5131.1) U45.24@8999.25,5131.1 ; U46.1@8989.25,5878.9 9011.1,5878.9 v1(9040,5850) ; U46.24@8989.25,6241.1 v1(8989.25,6269.25) ; U45.1@8999.25,4768.9 9011.1,4768.9 v1(9030,4750)
  Top Layer w8: U8.1@3323.46,5973.54 3323.46,6033.46 3370,6080 3370,6140 v1(3400,6170) ; v1(4276.54,5953.46) R9.2@4320,5953.46 ; v1(4710,6170) 4733.46,6146.54 R7.2@4733.46,6120 ; v1(4930,5220) 4937.48,5227.48 U42.46@4937.48,5277.83 ; R6.2@5253.46,6100 v1(5320,6100) ; R2.2@5313.46,6240 5313.46,6263.46 5320,6270 v1(5320,6290) ; R3.2@5353.46,5340 v1(5400,5340) ; v1(5580,5470) 5600,5470 5616.54,5453.46 R20.2@5620,5453.46 ; R19.2@5660,5813.46 v1(5703.46,5813.46) ; R28.1@5780,4644.88 v1(5844.88,4644.88) ; R29.1@5780,4995.12 v1(5835.12,4995.12) ; v1(5920,4750) 5940,4770 U35.34@5980,4770 ; v1(5930,4370) U35.50@5980,4370 ; U43.70@5962.2,5882.17 5962.2,5932.2 v1(5970,5940) ; R15.2@6000,6153.46 6000,6160 v1(6060,6220) ; R16.2@6440,6140 v1(6480,6140)
  Top Layer w10: U8.47@3514.41,6036.54 v1(3514.41,6094.41) ; v1(3530,6200) C32.1@3580.94,6200 ; U8.45@3565.59,6036.54 3565.59,6085.59 v1(3580,6100) 3591.18,6088.82 U8.44@3591.18,6036.54 ; U8.44@3590,6010 3590,6000 3610,5980 3630,5980 3642.36,5992.36 U8.42@3642.36,6036.54 ; U5.17@3695.16,5130.91 v1(3695.16,5194.84) ; v1(4400,5710) 4407.8,5717.8 U42.6@4477.83,5717.8 ; v1(4421.89,5461.89) U42.19@4477.83,5461.89 ; U42.25@4477.83,5343.78 4426.22,5343.78 v1(4420,5350) 4433.46,5363.46 U42.24@4477.83,5363.46 ; U42.26@4543.78,5277.83 4543.78,5216.22 v1(4560,5200) ; U42.31@4642.2,5277.83 v1(4642.2,5322.2) ; v1(4660,5940) 4661.89,5938.11 U42.94@4661.89,5882.17 ; U42.83@4878.43,5882.17 v1(4878.43,5938.43) ; U42.57@5082.17,5461.89 5118.11,5461.89 v1(5150,5430) ; U42.70@5082.17,5717.8 5132.2,5717.8 v1(5140,5710) ; R11.2@5120,4946.54 v1(5156.54,4946.54) ; v1(5650,5100) R22.2@5706.54,5100 ; v1(5740,5470) 5748.11,5461.89 U43.94@5797.83,5461.89 ; v1(5740,5690) 5751.57,5678.43 U43.83@5797.83,5678.43 ; v1(5962.2,5222.2) U43.6@5962.2,5277.83 ; U35.39@5980,4645 v1(6025,4645) ; U43.19@6218.11,5277.83 6218.11,5231.89 v1(6230,5220) ; U43.57@6218.11,5882.17 6218.11,5928.11 v1(6230,5940) ; U43.24@6316.54,5277.83 6316.54,5233.46 v1(6330,5220) 6336.22,5226.22 U43.25@6336.22,5277.83 ; U35.24@6340,4795 6385,4795 6410,4820 v1(6430,4820) ; U43.26@6402.17,5343.78 v1(6456.22,5343.78) ; U43.31@6402.17,5442.2 6477.8,5442.2 v1(6480,5440) ; U43.46@6402.17,5737.48 6447.48,5737.48 v1(6460,5750) ; R24.2@6640,5993.46 v1(6686.54,5993.46) ; R30.2@6820,5933.46 v1(6820,5980) ; v1(7800,5730) 7826.02,5703.98 U29.10@7871.06,5703.98 ; 7821.26,4602.78 U27.10@7867.22,4602.78 ; v1(7840,4680) 7830,4680 7807,4657 7807,4623 7826.02,4603.98 U27.10@7871.06,4603.98
  Top Layer w11: v1(6870,4880) 6891.57,4858.43 U36.83@6937.83,4858.43 ; v1(6880,4660) 6898.11,4641.89 U36.94@6937.83,4641.89 ; v1(7080,4390) 7102.2,4412.2 U36.6@7102.2,4457.83 ; U36.70@7102.2,5062.17 v1(7102.2,5117.8) ; v1(7358.11,4401.89) U36.19@7358.11,4457.83 ; U36.57@7358.11,5062.17 7358.11,5103.29 7360,5105.18 v1(7360,5110) ; U36.31@7542.17,4622.2 7587.8,4622.2 v1(7610,4600) ; U36.46@7542.17,4917.48 7597.48,4917.48 v1(7620,4940) ; CF1.13@7773.13,4002.36 7773.13,4063.13 v1(7780,4070) 7798.13,4051.87 CF1.38@7798.13,4002.36 ; v1(7870,6340) 7871.06,6341.06 U30.16@7871.06,6370.43
  Top Layer w12: v1(8680.43,6549.57) U34.9@8751.06,6549.57 ; U33.16@8751.06,5590.43 8820.43,5590.43 v1(8830,5600) ; U34.16@8751.06,6370.43 8810.43,6370.43 v1(8840,6400)
  Top Layer w16: U7.47@3514.41,4396.54 v1(3514.41,4450) ; 3514.41,4464.41 C34.1@3590,4540 ; U7.45@3565.59,4396.54 3565.59,4484.41 C34.1@3591.18,4510 ; U7.44@3591.18,4396.54 C34.1@3591.18,4521.18 ; C34.1@3615.47,4545.47 C34.1@3620,4550 ; C34.1@3620.94,4540 3642.36,4518.58 U7.42@3642.36,4396.54 ; v1(3810,5160) C14.2@3866.54,5160 ; C17.1@3900,5019.06 v1(3900,5080) ; v1(6285,4345) U35.6@6340,4345 ; v1(6295,4645) U35.18@6340,4645 ; U35.14@6340,4545 v1(6385,4545) ; v1(7803.98,6523.98) U30.10@7871.06,6523.98 ; U27.16@7871.06,4450.43 7919.57,4450.43 v1(7940,4430) ; v1(7871.06,5201.06) U28.16@7871.06,5230.43 ; U28.10@7871.06,5383.98 v1(7936.02,5383.98) ; U29.16@7871.06,5550.43 7940.43,5550.43 v1(7950,5560) ; U32.16@8751.06,5250.43 8810.43,5250.43 v1(8830,5270) ; U32.9@8751.06,5429.57 v1(8819.57,5429.57) ; U31.16@8771.06,4430.43 8820.43,4430.43 v1(8840,4450) ; U31.9@8771.06,4609.57 8771.06,4621.06 v1(8790,4640)
  Top Layer w20: v1(4284.02,4465.98) v1(4425.98,4465.98) ; v1(4400,4630) v1(4400,4750) ; v1(4600,4630) U41.5@4600,4690 ; U41.5@4600,4700 v1(4600,4750) ; v1(5140,4370) 5175.98,4405.98 5265.98,4405.98 v1(5300,4440) ; v1(5210,4600) 5240,4630 U40.1@5240,4640 ; v1(5440,4580) U40.5@5440,4640 ; v1(7005.98,4154.02) v1(7005.98,4314.02) ; v1(7400,5780) v1(7400,5890) ; v1(7504.02,6334.02) C150.1@7580,6334.02 v1(7580,6250) ; v1(7600,5780) U39.5@7600,5830
  Top Layer w30: v1(4220,6114) C151.1@4220,6194.02 v1(4287.98,6194.02) ; C121.1@9040,4192 v1(9040,4290) ; v1(9045.98,4115.98) C121.1@9045.98,4200
  MidLayer1 w8: v1(3400,6170) 3450,6170 3480,6200 v1(3530,6200) ; v1(5835.12,4995.12) v1@5840,5000
  MidLayer1 w16: v1@4219,6113 v1(4220,6114) ; v1(4287.98,6194.02) v1@4290,6192 ; v1@9040,4110 v1(9045.98,4115.98)
  Bottom Layer w10: v1(3580,6100) 3606.54,6073.46 C18.2@3606.54,6040 ; v1(3591.18,4460) 3606.54,4444.65 C29.2@3606.54,4400 ; v1(4400,5710) 4416.54,5710 C45.1@4446.54,5740 ; v1(4421.89,5461.89) 4446.54,5437.24 C44.1@4446.54,5420 ; v1(4560,5200) C50.1@4560,5246.54 ; C47.1@4620,5913.46 4633.46,5913.46 v1(4660,5940) ; v1(4878.43,5938.43) 4906.85,5910 C46.1@4920,5910 ; v1(4930,5220) 4961.5,5246.54 C49.1@4980,5246.54 ; C51.1@5113.46,5420 5150,5420 v1(5150,5430) ; C48.1@5113.46,5740 5113.46,5736.54 v1(5140,5710) ; v1(5740,5470) 5766.54,5443.46 C73.1@5766.54,5440 ; v1(5740,5690) 5740,5713.46 C72.1@5766.54,5740 ; C75.1@5920,5246.54 5937.87,5246.54 v1(5962.2,5222.2) ; C71.1@5940,5913.46 5940,5920 5960,5940 v1(5970,5940) ; v1(6230,5220) 6256.54,5246.54 C74.1@6280,5246.54 ; v1(6230,5940) C70.1@6260,5910 ; C68.1@6433.46,5440 v1(6480,5440) ; C69.1@6433.46,5780 6440,5780 6460,5760 v1(6460,5750) ; v1(6870,4880) 6870,4890 6900,4920 C95.1@6906.54,4920 ; v1(6880,4660) 6906.54,4633.46 C94.1@6906.54,4620 ; C88.1@7060,5100 7084.41,5100 v1(7102.2,5117.8) ; v1(7080,4390) C93.1@7080,4426.54 ; v1(7358.11,4401.89) 7382.76,4426.54 C92.1@7400,4426.54 ; v1(7360,5110) 7376.54,5093.46 C89.1@7400,5093.46 ; C91.1@7573.46,4600 v1(7610,4600) ; C90.1@7573.46,4940 v1(7620,4940) ; v1@7820,5990 7823.46,5993.46 C139.2@7880,5993.46 ; v1(7830,4850) 7853.46,4826.54 C141.2@7900,4826.54 ; v1(7830,5030) 7853.46,5006.54 C140.2@7900,5006.54 ; v1(7833.46,6146.54) C138.2@7880,6146.54 ; 7880,6350 7956.54,6426.54 C124.2@8000,6426.54 ; C128.2@7920,4486.54 7920,4450 v1(7940,4430) ; v1(7950,5320) 7983.46,5286.54 C127.2@8000,5286.54 ; v1(7950,5560) 7976.54,5586.54 C126.2@8000,5586.54 ; v1@8700,5020 8706.54,5026.54 C116.2@8780,5026.54 ; v1(8720,4840) 8753.46,4806.54 C115.2@8780,4806.54 ; C129.2@8780,4466.54 8823.46,4466.54 v1(8840,4450) ; C108.2@8780,5986.54 8826.54,5986.54 v1(8830,5990) ; C107.2@8780,6166.54 8826.54,6166.54 v1(8830,6170) ; v1(8830,5270) 8866.54,5306.54 C130.2@8880,5306.54 ; v1(8830,5600) 8830,5620 8856.54,5646.54 C131.2@8880,5646.54 ; v1(8840,6400) 8866.54,6426.54 C125.2@8880,6426.54
  other v1: 3642.36,4460 3580.94,6259.06
WAIT: CF1.42 U36.36 | length 983.1
  Top Layer w10: 7690,4680 7720,4650 7720,4410 8000,4130 CF1.42@8000,3990
  Top Layer w11: U36.36@7542.17,4720.63 7649.37,4720.63 7690,4680
WE: CF1.36 U36.32 | length 742.8
  Top Layer w10: 7661.21,4588.79 7661.21,4228.79 7698.13,4191.87 CF1.36@7698.13,4002.36
  Top Layer w11: U36.32@7542.17,4641.89 7593.57,4641.89 7605.46,4630 7620,4630 7661.21,4588.79
pads on no net: C86.1 CF1.0 CF1.25 CF1.34 CF1.35 CF1.40 CF1.43 CF1.45 CF1.46 CONN1.0 CONN1.34 JP1.1 JP2.12 JP2.14 U5.4 U5.18 U6.3 U6.5 U7.2 U7.3 U7.18 U7.19 U7.20 U7.21 U7.22 U7.23 U7.24 U7.25 U7.28 U7.29 U7.30 U7.31 U7.32 U7.33 U7.34 U7.35 U7.36 U7.38 U7.48 U8.2 U8.3 U8.18 U8.19 U8.20 U8.21 U8.22 U8.23 U8.24 U8.25 U8.28 U8.29 U8.30 U8.31 U8.32 U8.33 U8.34 U8.35 U8.36 U8.38 U8.48 U9.2 U9.3 U9.5 U10.2 U10.3 U10.5 U11.2 U11.3 U11.5 U12.2 U12.3 U12.5 U13.2 U13.3 U13.5 U14.2 U14.3 U14.5 U15.2 U15.3 U15.5 U16.2 U16.3 U16.5 U17.2 U17.3 U17.5 U18.2 U18.3 U18.5 U19.2 U19.3 U19.5 U20.2 U20.3 U20.5 U21.2 U21.3 U21.5 U22.2 U22.3 U22.5 U23.2 U23.3 U23.5 U24.2 U24.3 U24.5 U25.9 U28.9 U30.9 U35.5 U35.10 U35.13 U35.21 U35.38 U35.42 U35.43 U35.44 U35.45 U35.46 U35.47 U35.51 U36.1 U36.2 U36.4 U36.5 U36.8 U36.9 U36.11 U36.12 U36.37 U36.38 U36.53 U36.54 U36.55 U36.59 U36.60 U36.61 U36.62 U36.63 U36.74 U36.75 U36.88 U36.89 U36.90 U36.91 U36.92 U36.96 U36.98 U37.5 U38.2 U38.9 U38.12 U38.13 U38.14 U38.15 U38.16 U39.4 U40.4 U42.76 U42.77 U42.78 U42.98 U42.100 U43.76 U43.77 U43.78 U43.98 U43.100 Y1.3 Y1.4

## Polygon pours and split planes (outlines as drawn)
GND on Top Layer (hatched 90Degree grid 8 track 8, remove dead copper): 4060,5140 5082.17,5140 5082.17,5110 4070,5110 4070,4060 5790,4060 5790,5140 5850,5140 5850,5260 4060,5260
GND on Top Layer (hatched 90Degree grid 8 track 8, remove dead copper): 6540,6600 6540,5380 7830,5380 7830,6600
+2.5VCC on MidLayer1 (hatched 90Degree grid 8 track 8, remove dead copper): 7790,6910 7790,4060 4060,4060 4060,6910
+5VCC on Bottom Layer (hatched 90Degree grid 8 track 8, remove dead copper): 9400.65,6910 7811.73,6910 7811.73,4037.21 3450,4030 3450,3050 9450,3050 9450,6910
+1.2VCCUSB on Bottom Layer (hatched 90Degree grid 8 track 8, remove dead copper): 5564.65,6110.81 6915.68,6110.81 6915.68,5014.21 5807.64,5014.21 5807.64,4540 5180,4540 5180,5142.64 5564.65,5142.64 5564.65,6120.69 5574.36,6110.81
+1.2VCC on Bottom Layer (hatched 90Degree grid 8 track 8, remove dead copper): 7838.26,6420 4110,6420 4110,4040 7828.16,4040 7828.16,6420
GND on Internal Plane 1 (split plane): 3474.99,4270 3474.99,4800 cw(c3490,4800) 3479.4,4810.63 3479.38,4810.62 3559.38,4890.62 cw(c3570,4880) 3585.01,4880 cw(c3570,4880) 3580.62,4869.38 3505.01,4793.78 3505.01,4270 cw(c3490,4270)
GND on Internal Plane 1 (split plane): 2020.02,3020.01 4604.98,3020.01 4604.98,3660 cw(c4620,3660) 4609.4,3670.63 4609.38,3670.62 4669.38,3730.62 4669.37,3730.6 cw(c4680,3720) 4680,3735.01 5260,3735.01 cw(c5260,3720) 5275.02,3720 cw(c5260,3720) 5260,3704.99 4686.22,3704.99 4635.02,3653.78 4635.02,3020.01 5634.98,3020.01 5634.98,3623.78 5553.78,3704.99 5380,3704.99 cw(c5380,3720) 5380,3735.01 5560,3735.01 cw(c5560,3720) 5570.63,3730.6 5570.62,3730.62 5660.62,3640.62 5660.6,3640.63 cw(c5650,3630) 5665.02,3630 5665.02,3020.01 9479.99,3020.01 9479.99,6942.98 3505.01,6942.98 3505.01,5970 cw(c3490,5970) 3474.99,5970 3474.99,6942.98 2020.02,6942.98
VCC on Internal Plane 2 (split plane): 2020.02,3020.01 2020.02,6942.98 9479.99,6942.98 9479.99,3020.01
AVDD on Internal Plane 2 (split plane): 2462.08,3235.01 2055.01,3642.08 2055.01,6297.92 2060,6840 3170,6840 3434.99,6257.92 3434.99,5700 ccw(c3440,5700) 3436.47,5696.44 3436.45,5696.45 3536.45,5596.45 3536.44,5596.47 ccw(c3540,5600) 3540,5594.98 3607.92,5594.98 3754.99,5447.92 3754.99,5332.08 3727.92,5305.02 3660,5305.02 ccw(c3660,5300) 3656.44,5303.53 3656.45,5303.55 3516.45,5163.55 3516.47,5163.56 ccw(c3520,5160) 3514.99,5160 3514.99,4802.08 3426.45,4713.55 3426.47,4713.56 ccw(c3430,4710) 3424.99,4710 3424.99,3970 ccw(c3430,3970) 3426.47,3966.44 3426.45,3966.45 3534.99,3857.92 3534.99,3235.01

## Keep-outs
Keep-Out Layer:
  lines w10: 9450,3047 9450,6910 ; 9450,3050 2050,3050 2050,6913 9450,6913

## Other copper
Top Layer:
  text "Layer 1" at 9660,4650 h90
MidLayer1:
  text "Layer 3" at 9660,4300 h90
MidLayer2:
  text "Layer 4" at 9660,4160 h90
Bottom Layer:
  text "Layer 6" at 9660,3850 h90
Internal Plane 1 (plane layer: these items are gaps in the copper):
  lines w30: 3490,4270 3490,4800 3570,4880 ; 3490,5970 3490,6963 ; 3570,3050 3570,3960 ; 3570,5060 3570,5690 ; 4620,3000 4620,3660 4680,3720 5260,3720 ; 5380,3720 5560,3720 5650,3630 5650,3010
  text "Layer 2" at 9660,4500 h90
Internal Plane 2 (plane layer: these items are gaps in the copper):
  lines w10: 2050,3640 2050,6300 2300,6550 3150,6550 3440,6260 3440,5700 3540,5600 3610,5600 3760,5450 3760,5330 3730,5300 3660,5300 3520,5160 3520,4800 3430,4710 3430,3970 3540,3860 3540,3230 2460,3230 2050,3640
  text "Layer 5" at 9660,4010 h90

## Silkscreen, mask and mechanical layers (free items; w line width, h text height)
Top Overlay:
  text "AUX Power" at 7720,6800 h40
  text "Analog IO" at 2330,5680 h40 r90
  text "Digital Input" at 9130,4670 h40 r90
  text "Digital Output" at 8300,4630 h40 r90
  text "Boot CF" at 7590,3340 h40
  text "Soma Backplane Peripherals" at 2770,3230 h90
  text "Copyright Eric Jonas 2002-2005" at 2760,3160 h40
  text "ver 1.1" at 4230,3160 h40
  text "soma.mit.edu" at 2760,3098 h35
  text "PCLM, MIT" at 4200,3098 h35
Mechanical 5:
  lines w1: 2000,3000 2000,6960 9500,6960 9500,3000 2000,3000

## Dimensions
2050,3050 to 2050,6913 on Mechanical 1
2050,3050 to 9450,3050 on Mechanical 1

## Text inside footprints (layer, text, board x,y; h text height)
CONN1: Top Overlay "MOLEX 71661-2068 PLUG" at 4436,6453 h30
J1: Top Overlay "1" at 9360,4440 h50 r90; Top Overlay "2" at 9260,4440 h50 r90; Top Overlay "40" at 9260,6520 h50 r90; Top Overlay "39" at 9360,6520 h50 r90
J2: Top Overlay "1" at 8540,4440 h50 r90; Top Overlay "2" at 8440,4440 h50 r90; Top Overlay "40" at 8440,6520 h50 r90; Top Overlay "39" at 8540,6520 h50 r90
JP3: Top Overlay "39" at 2220,6040 h50 r90; Top Overlay "40" at 2120,6040 h50 r90; Top Overlay "2" at 2120,3960 h50 r90; Top Overlay "1" at 2220,3960 h50 r90